# EAGLE board STM32F050F Base (EAGLE 6.5.0)

Size 49.53 x 49.53 mm. Coordinates in mm from the lower left corner, seen from the top.
Outline: 0,49.52 0,0 49.53,0 49.53,49.52
Outline: 0,49.53 49.53,49.53
Copper layers (1*16): Top 0.035mm / dielectric 1.5mm / Bottom 0.035mm
Design rules "default": minimum track width 10mil, minimum drill 24mil, track to track 8mil, track to pad 8mil, pad to pad 8mil, via to via 8mil, smd to smd 8mil, copper to edge 40mil, drill to drill 8mil, minimum pad ring 10mil, minimum via ring 8mil, stop-mask expansion 4mil, vias tented up to drill 0mil, thermal gap 10mil

## Footprints (pad centres in the part's own frame; a part is rotated, then mirrored left to right if it is on the bottom)
C1206 = smd 1.3 x 1.6: 1 -1.524,0; 2 1.524,0
C7343/T = smd 2.6 x 2.4: + 3.175,0; - -3.175,0
C0805 = smd 1.2 x 1.3: 1 -1.016,0; 2 1.016,0
L0603 = smd 0.8 x 0.8: 1 -0.762,0; 2 0.762,0
1X02/90-S = drill 1.016 square: 1 -2.54,-3.81 | drill 1.016 octagon: 2 0,-3.81
1X05/90-S = drill 1.016 square: 1 -5.08,-3.81 | drill 1.016 octagon: 2 -2.54,-3.81; 3 0,-3.81; 4 2.54,-3.81; 5 5.08,-3.81
SMA = smd 2 x 2: A 2,0; C -2,0
TO263-5 = smd 1.067 x 2.159: 1 -3.404,-5.791; 2 -1.702,-5.791; 3 0,-5.791; 4 1.702,-5.791; 5 3.404,-5.791 | smd 10.8 x 10.41: 6 0,2.54
STM32_BASE_MINI = drill 1.016 octagon: +12V 3.175,46.355; GND1 8.255,46.355; GND2 43.815,46.355; GND3 46.355,3.175; GND4 5.715,3.175; NRST 31.115,46.355; PA0 26.035,46.355; PA1 23.495,46.355; PA2 20.955,46.355; PA3 18.415,46.355; PA4 15.875,46.355; PA5 10.795,3.175; PA6 13.335,3.175; PA7 15.875,3.175; PA9 26.035,3.175; PA10 28.575,3.175; PA13 33.655,3.175; PA14 36.195,3.175; PB1 20.955,3.175; PF0 38.735,46.355; PF1 36.195,46.355; VDD1 10.795,46.355; VDD2 46.355,46.355; VDD3 43.815,3.175; VDD4 3.175,3.175
TSSOP20 = smd 0.305 x 0.991: 1 -2.925,-2.918; 2 -2.275,-2.918; 3 -1.625,-2.918; 4 -0.975,-2.918; 5 -0.325,-2.918; 6 0.325,-2.918; 7 0.975,-2.918; 8 1.625,-2.918; 9 2.275,-2.918; 10 2.925,-2.918; 11 2.925,2.918; 12 2.275,2.918; 13 1.625,2.918; 14 0.975,2.918; 15 0.325,2.918; 16 -0.325,2.918; 17 -0.975,2.918; 18 -1.625,2.918; 19 -2.275,2.918; 20 -2.925,2.918
TO252 = smd 1 x 1.6: 1 -2.28,-6.07; 2 2.28,-6.07 | smd 5.4 x 6.2: 3 0,1.23

## Placement (x,y rotation side)
C1  4.7uF  [C1206]  5.08,20.32 90 top
C2  100uF 20V  [C7343/T]  10.16,20.32 90 top
C3  330uF 6.3V  [C7343/T]  31.75,21.59 270 top
C4  0.01uf  [C0805]  41.91,39.37 270 top
C5  1uf  [C0805]  44.45,38.1 270 top
C6  0.1uF  [C0805]  43.18,19.05 0 top
C7  0.1uF  [C0805]  43.18,24.13 0 top
C8  4.7uF  [C1206]  43.18,21.59 0 top
C9  [C1206]  41.91,12.7 90 top
L1  L_0603  [L0603]  20.32,21.59 180 top
PWR  [1X02/90-S]  7.62,38.1 90 top
SWD  [1X05/90-S]  41.91,13.97 270 top
U$1  10MQ040  [SMA]  5.08,35.56 90 top
U$2  LM2596S  [TO263-5]  19.05,31.75 0 top
U$3  STM32F050F_BASE_MINI  [STM32_BASE_MINI]  0,0 0 top
U$4  STM32F050F4P6  [TSSOP20]  43.18,30.48 180 top
U$6  30WQ03  [TO252]  20.32,11.43 270 top

## Library data of the parts
C1-C9 = rc-master-smd
L1 = rc-master-smd; LCN0603T-47NJ-N: 47uH
PWR SWD = pinhead-2
U$1-U$3 U$6 = my-library
U$4 = STM32F0

## Nets
+3V3: C3.+ C4.2 C5.2 C6.2 C7.2 C8.2 L1.1 SWD.1 U$2.4 U$3.VDD1 U$3.VDD2 U$3.VDD3 U$3.VDD4 U$4.5 U$4.16
+12V: C1.2 C2.+ U$1.C U$2.1 U$3.+12V
GND: C1.1 C2.- C3.- C4.1 C5.1 C6.1 C7.1 C8.1 C9.2 PWR.2 SWD.3 U$2.3 U$2.5 U$3.GND1 U$3.GND2 U$3.GND3 U$3.GND4 U$4.1 U$4.15 U$6.1 U$6.2
N$23: PWR.1 U$1.A
N$34: L1.2 U$2.2 U$6.3
NRST: SWD.5 U$3.NRST U$4.4
PA0: U$3.PA0 U$4.6
PA1: U$3.PA1 U$4.7
PA2: U$3.PA2 U$4.8
PA3: U$3.PA3 U$4.9
PA4: U$3.PA4 U$4.10
PA5: U$3.PA5 U$4.11
PA6: U$3.PA6 U$4.12
PA7: U$3.PA7 U$4.13
PA9: U$3.PA9 U$4.17
PA10: U$3.PA10 U$4.18
PA13: C9.1 SWD.4 U$3.PA13 U$4.19
PA14: SWD.2 U$3.PA14 U$4.20
PB1: U$3.PB1 U$4.14
PF0: U$3.PF0 U$4.2
PF1: U$3.PF1 U$4.3

## Tracks (layer width: path | path; a pad name or v marks a point on that pad's centre or on a via)
+3V3  (14 unrouted)
+12V  (4 unrouted)
GND  (20 unrouted)
N$23  (1 unrouted)
N$34  (2 unrouted)
NRST  (2 unrouted)
PA0  (1 unrouted)
PA1  (1 unrouted)
PA2  (1 unrouted)
PA3  (1 unrouted)
PA4  (1 unrouted)
PA5  (1 unrouted)
PA6  (1 unrouted)
PA7  (1 unrouted)
PA9  (1 unrouted)
PA10  (1 unrouted)
PA13  (3 unrouted)
PA14  (2 unrouted)
PB1  (1 unrouted)
PF0  (1 unrouted)
PF1  (1 unrouted)